# Altium PCB PCB_edp12.PcbDoc
Units mil, origin at the board's own origin, x right, y up, seen from the top; angles counter-clockwise.
Board outline 2550 x 4000 mil, 2 copper layers (Top Layer, Bottom Layer); 31 components, 23 nets, 168 pads, 59 vias.
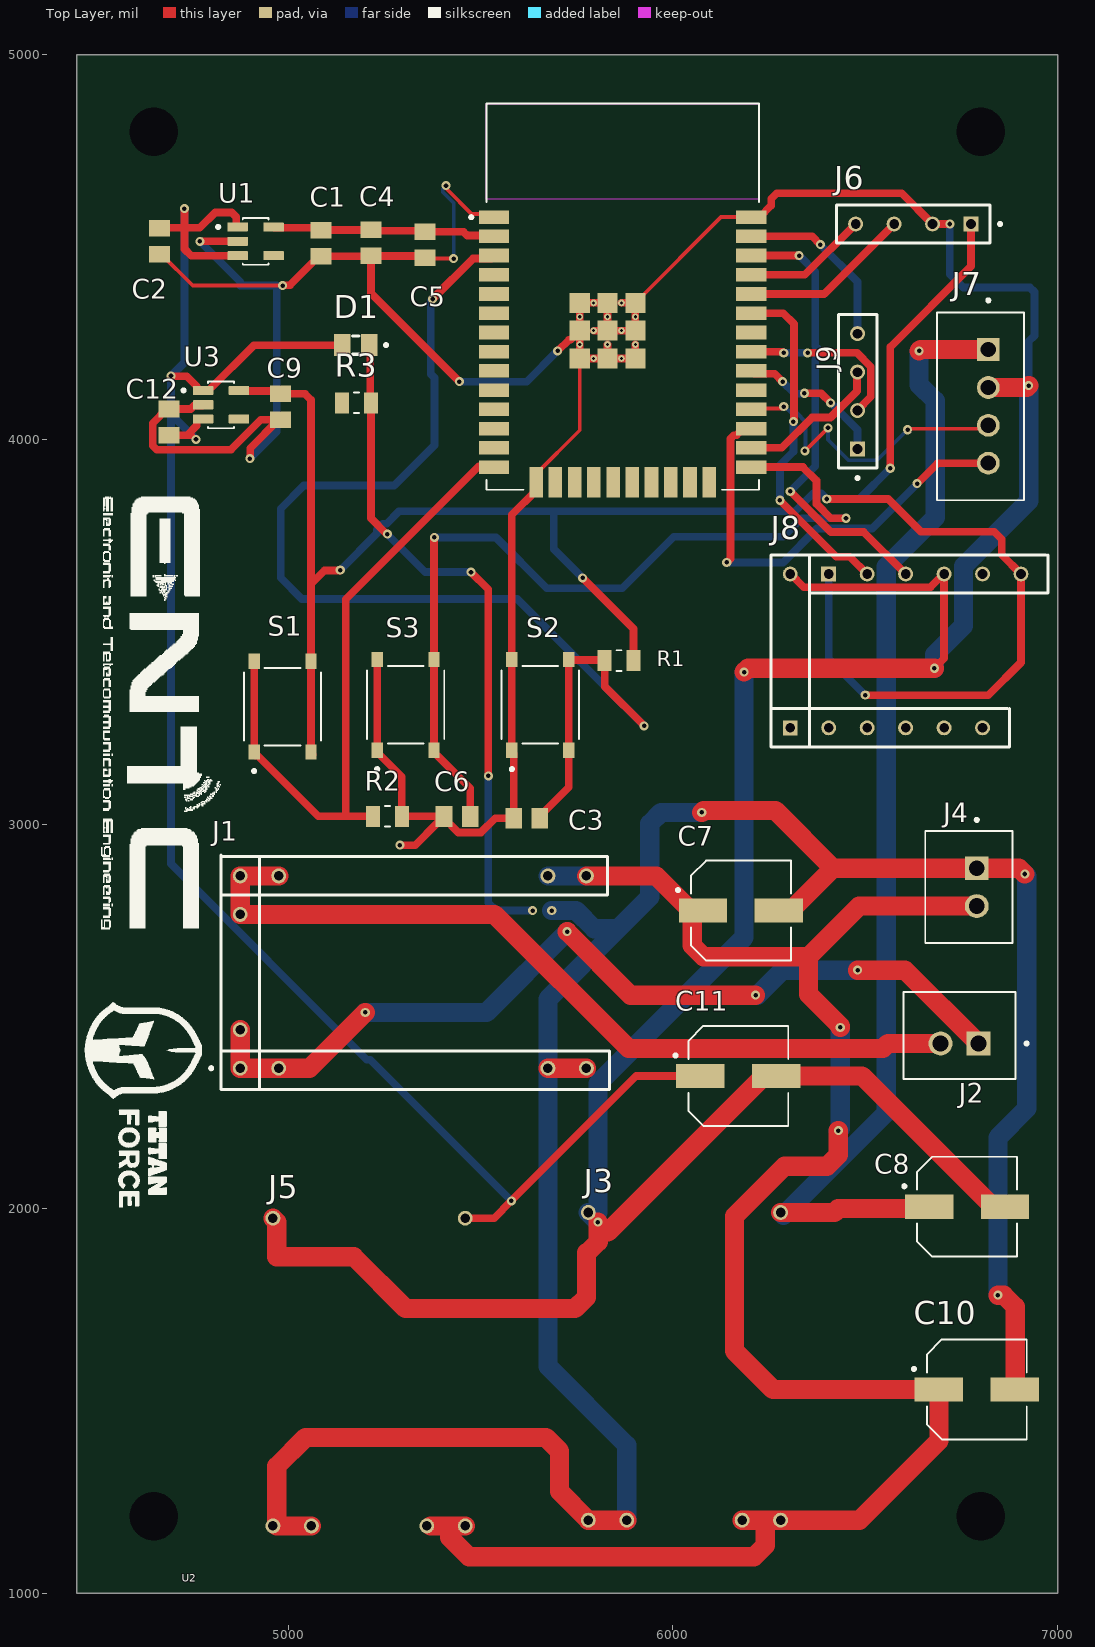
[diagram p0: Top Layer view]
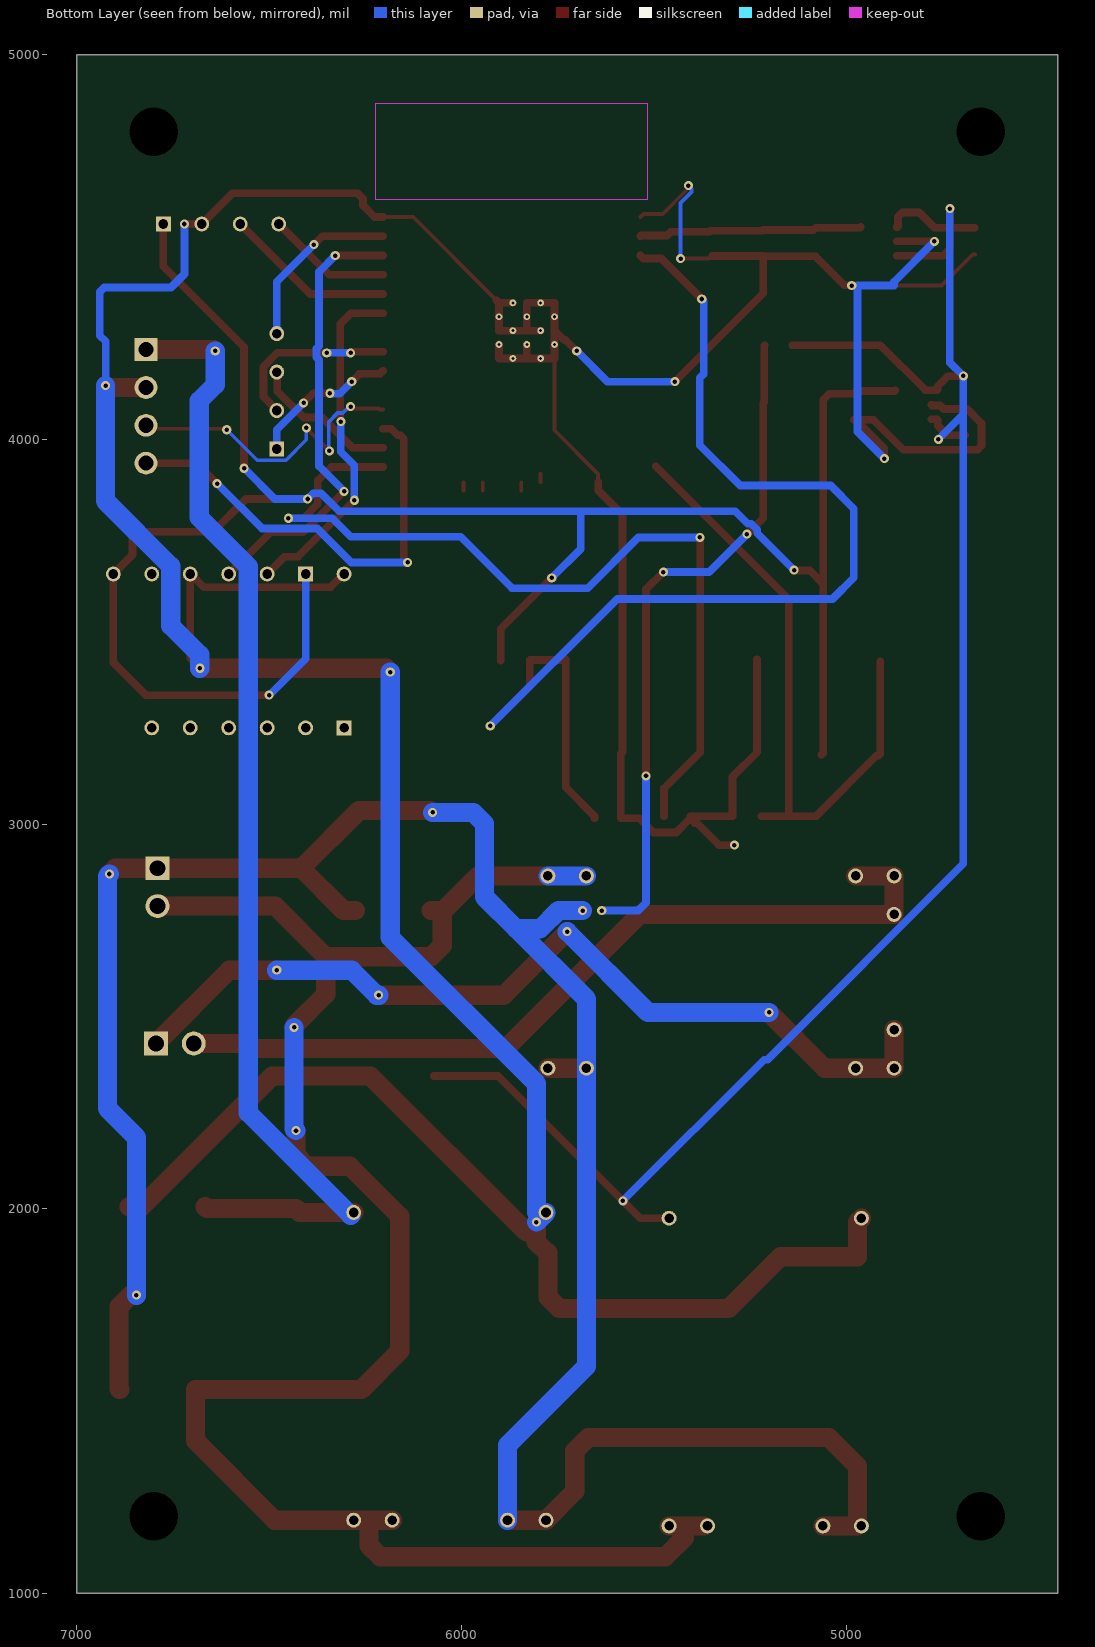
[diagram p1: Bottom Layer view, seen from below]

## Layer stack, top to bottom
Top Solder: solder mask 0.4, Solder Resist, Dk 3.5
Top Layer: signal copper 1.4
Dielectric 1: dielectric 12.6, FR-4, Dk 4.8
Bottom Layer: signal copper 1.4
Bottom Solder: solder mask 0.4, Solder Resist, Dk 3.5

## Board outline
4450,1000 7000,1000 7000,5000 4450,5000

## Design rules (kind name [scope] priority, off if disabled: settings)
Clearance [All] p1: gap=5 ignorepadtopadclearanceinfootprint=FALSE except(0: Arc-Hole Track-Hole SMDPad-Hole THPad-Hole Via-Hole Fill-Hole Poly-Hole Region-Hole Text-Hole)
ComponentClearance [All] p1: gap=5 collisioncheckmode=3 verticalgap=5 showdistances=TRUE
DiffPairsRouting [All] p1: maxlimit=5 minlimit=5 mostfreqgap=5 toplayer_minwidth=5 toplayer_maxwidth=71497.95 toplayer_prefwidth=5 bottomlayer_minwidth=5 bottomlayer_maxwidth=71497.95 bottomlayer_prefwidth=5 maxuncoupledlength=500
Height [All] p1: minheight=0 maxheight=71497.94 prefheight=500
HoleSize [All] p1: absolutevalues=TRUE maxlimit=248.03 minlimit=11.81 maxpercent=80.000 minpercent=20.000
HoleToHoleClearance [All] p1: gap=9.84 allowstackedmicrovias=FALSE
MinimumAnnularRing [All] p1: minimumring=5
MinimumSolderMaskSliver [All] p1: minsoldermaskwidth=0
PlaneClearance [All] p1: clearance=5
PlaneConnect [All] p1: planeconnectstyle=Direct reliefexpansion=4 reliefentries=4 reliefconductorwidth=4 reliefairgap=4
PolygonConnect PolygonConnectVias [All vs IsVia] p1: connectstyle=Direct reliefconductorwidth=4 reliefentries=4 polygonreliefangle="90 Angle" airgapwidth=4
PolygonConnect PolygonConnectPowerPads [All vs InPadClass('PowerPads')] p2: connectstyle=Direct reliefconductorwidth=10 reliefentries=4 polygonreliefangle="90 Angle" airgapwidth=10
PolygonConnect [All] p3: connectstyle=Relief reliefconductorwidth=5 reliefentries=4 polygonreliefangle="90 Angle" airgapwidth=5
RoutingVias [All] p1: holewidth=11.81 width=23.62 viastyle="Through Hole" minholewidth=11.81 minwidth=23.62 maxholewidth=248.03 maxwidth=257.87
SilkToSilkClearance [All] p1: silktosilkclearance=0
SilkToSolderMaskClearance [IsPad] p1: minsilkscreentomaskgap=5 clearancetoexposedcopper=TRUE
SolderMaskExpansion [All] p1: expansion=2.95 istentingtop=FALSE
UnpouredPolygon BoardOutlineClearance [All] p2:
Width [All] p1: maxlimit=71497.94 minlimit=5 preferedwidth=5 minimp=50.000000 maximp=50.000000 favimp=50.000000
20 further rules are at their usual default settings.

## Components (designator, comment, footprint, x,y, rotation, side; value= is the part's Value field where it differs from the comment)
C1 "1uF" CAPC2012X135N 5085,4510 r270 top
C2 "1uF" CAPC2012X135N 4665,4515 r270 top
C3 "CL31A106KBHNNNE" CAPC2012X135N 5620,3015 r180 top
C4 "10uF" CAPC2012X135N 5215,4511.02 r90 top
C5 "100nF" CAPC2012X135N 5355,4506.02 r90 top
C6 "CL31A106KBHNNNE" CAPC2012X135N 5438.98,3020 r180 top
C7 "47uF" CAP_EEEFH1V470XL 6176.57,2775 r0 top
C8 "47uF" CAP_EEEFH1V470XL 6765,2005 r0 top
C9 "1uF" CAPC2012X135N 4980,4085 r270 top
C10 "47uF" CAP_EEEFH1V470XL 6790,1530 r0 top
C11 "47uF" CAP_EEEFH1V470XL 6170,2345 r0 top
C12 "1uF" CAPC2012X135N 4690,4045 r90 top
D1 "597-3305-607F" LEDC2012X70N 5175.43,4245 r180 top
J1 "TP5100" SAMTEC_TS-121-G-AA#1 5875,2365 r0 top
J2 "Vin" JST_B2B-XH-A(LF)(SN) 6745,2450 r0 top
J3 "TS-121-G-AA" SAMTEC_TS-121-G-AA#2 6380,2090 r90 top
J4 "Battery" JST_B2B-XH-A(LF)(SN) 6769.33,2835.79 r90 top
J5 "TS-121-G-AA" SAMTEC_TS-121-G-AA#2 5560,2075 r90 top
J6 "Code_uploader" SAMTEC_TS-115-G-AA#1 6075,4560 r180 top
J7 "GSM JST Connector" JST_B4B-XH-A(LF)(SN) 6799.33,4085.79 r90 top
J8 "TS-115-G-AA" SAMTEC_TS-115-G-AA#2 7005,3150 r0 top
J9 "Current sensor" SAMTEC_TS-115-G-AA#1 6480,4675 r90 top
R1 "10K" RESC2012X60N 5860,3425 r0 top
R2 "10K" RESC2012X60N 5257.6,3020 r180 top
R3 "330" RESC2012X60N 5177.4,4095 r0 top
S1 "PB1" SW_TS-1187A-B-A-B 4985,3305 r90 top
S2 "RESET" SW_TS-1187A-B-A-B 5655,3310 r90 top
S3 "BOOT" SW_TS-1187A-B-A-B 5305,3310 r90 top
U1 "AP2112K-3.3TRG1" SOT95P285X140-5N 4915,4515 r0 top
U2 "ESP32-WROOM-32D" MODULE_ESP32-WROOM-32D 5869.37,4370.94 r0 top
U3 "AP2112K-3.3TRG1" SOT95P285X140-5N 4825,4090 r0 top

## Footprints (in the part's own frame and the unit in brackets; to place one, negate y for a bottom-side part, rotate by r counter-clockwise, add the part's x,y. Pads: shape width x height; smd on the part's side, far side on the other; paste and mask are expansions set on the pad)
CAP_EEEFH1V470XL [mm]
  rect 3.2x1.6 smd: 1(-2.5,0) 2(2.5,0)
  silkscreen extent -4.25,-3.3 3.3,3.3, body extent -3.65,-3.3 3.65,3.3, height 7.7
CAPC2012X135N [mm]
  rect 1.1x1.38 smd: 1(-0.863,0) 2(0.863,0)
JST_B2B-XH-A(LF)(SN) [mm]
  rect 1.575x1.575 / inner round 1.575 / far side rect 1.575x1.575 hole 1.05: 1(1.25,-0.525)
  round 1.575 hole 1.05: 2(-1.25,-0.525)
  silkscreen extent -3.7,-2.88 4.54,2.88, body extent -3.7,-2.88 3.7,2.88, height 7
JST_B4B-XH-A(LF)(SN) [mm]
  rect 1.508x1.508 / inner round 1.508 / far side rect 1.508x1.508 hole 1: 1(3.75,-0.525)
  round 1.508 hole 1: 2(1.25,-0.525) 3(-1.25,-0.525) 4(-3.75,-0.525)
  silkscreen extent -6.2,-2.88 7.1,2.88, body extent -6.2,-2.88 6.2,2.88, height 7
LEDC2012X70N [mm]
  rect 1.1x1.45 smd: A(0.9,0) C(-0.9,0)
  silkscreen extent -2.1,-0.6 0.2,0.6, body extent -1,-0.63 1,0.63, height 0.7
MODULE_ESP32-WROOM-32D [mm]
  rect 2x0.9 smd: 1(-8.5,5.26) 2(-8.5,3.99) 3(-8.5,2.72) 4(-8.5,1.45) 5(-8.5,0.18) 6(-8.5,-1.09) 7(-8.5,-2.36) 8(-8.5,-3.63) 9(-8.5,-4.9) 10(-8.5,-6.17) 11(-8.5,-7.44) 12(-8.5,-8.71) 13(-8.5,-9.98) 14(-8.5,-11.25) 25(8.5,-11.25) 26(8.5,-9.98) 27(8.5,-8.71) 28(8.5,-7.44) 29(8.5,-6.17) 30(8.5,-4.9) 31(8.5,-3.63) 32(8.5,-2.36) 33(8.5,-1.09) 34(8.5,0.18) 35(8.5,1.45) 36(8.5,2.72) 37(8.5,3.99) 38(8.5,5.26)
  rect 0.9x2 smd: 15(-5.715,-12.25) 16(-4.445,-12.25) 17(-3.175,-12.25) 18(-1.905,-12.25) 19(-0.635,-12.25) 20(0.635,-12.25) 21(1.905,-12.25) 22(3.175,-12.25) 23(4.445,-12.25) 24(5.715,-12.25)
  rect 1.33x1.33 smd: 39_1(-2.835,-0.405) 39_2(-1,-0.405) 39_3(0.835,-0.405) 39_4(-2.835,-2.24) 39_5(-1,-2.24) 39_6(0.835,-2.24) 39_7(-2.835,-4.075) 39_8(-1,-4.075) 39_9(0.835,-4.075)
  round 0.45 hole 0.2: 39_10(-1.917,-0.405) 39_11(-0.082,-0.405) 39_12(-2.835,-1.322) 39_13(-1,-1.322) 39_14(0.835,-1.322) 39_15(-1.917,-2.24) 39_16(-0.082,-2.24) 39_17(-2.835,-3.157) 39_18(-1,-3.157) 39_19(0.835,-3.157) 39_20(-1.917,-4.075) 39_21(-0.082,-4.075)
  Keep-Out Layer region: 9,6.45 -9,6.45 -9,12.75 9,12.75
  silkscreen extent -10.1,-12.75 9,12.75, body extent -9,-12.75 9,12.75, height 3.25
RESC2012X60N [mm]
  rect 0.92x1.38 smd: 1(-0.955,0) 2(0.955,0)
  silkscreen extent -0.17,-0.68 0.17,0.68, body extent -1,-0.63 1,0.63, height 0.6
SAMTEC_TS-115-G-AA#1 [mm]
  rect 0.985x0.985 hole 0.635: 01(-17.78,0)
  round 0.985 hole 0.635: 02(-15.24,0) 03(-12.7,0) 04(-10.16,0)
  silkscreen extent -19.8,-1.27 -8.89,1.27
SAMTEC_TS-115-G-AA#2 [mm]
  rect 0.985x0.985 hole 0.635: 01(-17.78,2.54) 08(-15.24,12.7)
  round 0.985 hole 0.635: 02(-15.24,2.54) 03(-12.7,2.54) 04(-10.16,2.54) 05(-7.62,2.54) 06(-5.08,2.54) 07(-17.78,12.7) 09(-12.7,12.7) 10(-10.16,12.7) 11(-7.62,12.7) 12(-5.08,12.7) 13(-2.54,12.7)
  silkscreen extent -19.05,1.27 -0.76,13.97
SAMTEC_TS-121-G-AA#1 [mm]
  round 0.985 hole 0.635: 01(-25.4,12.7) 02(-22.86,12.7) 03(-25.4,10.16) 04(-25.4,2.54) 05(-25.4,0) 06(-22.86,0) 07(-5.08,12.7) 08(-2.54,12.7) 09(-5.08,0) 10(-2.54,0)
  silkscreen extent -27.42,-1.4 -1.02,14.1
SAMTEC_TS-121-G-AA#2 [mm]
  round 0.985 hole 0.635: 01(-22.86,2.54) 02(-22.86,5.08) 03(-22.86,12.7) 04(-22.86,15.24) 05(-2.54,2.54) 06(-2.54,15.24)
SOT95P285X140-5N [mm]
  rrect15% 1.35x0.6 smd: 1(-1.185,0.95) 2(-1.185,0) 3(-1.185,-0.95) 4(1.185,-0.95) 5(1.185,0.95)
  silkscreen extent -2.57,-1.55 0.85,1.55, body extent -1.5,-1.4 1.5,1.4, height 1.4
SW_TS-1187A-B-A-B [mm]
  rect 1x0.75 smd: 1(-3,1.875) 2(3,1.875) 3(-3,-1.875) 4(3,-1.875)
  silkscreen extent -4.35,-2.55 2.55,2.55

## Part data
C1 C2 C9 C12: library part CL21B105KOFNNNE, "Cap Ceramic 1uF 16V X7R 10% Pad SMD 0805 125C T/R", Package=None, Availability=Unavailable, MP=CL21B105KOFNNNE, Price=None
C3 C6: "10ÂµF Â±10% 50V Ceramic Capacitor X5R 1206 (3216 Metric)", Package="1206 Samsung", Availability=Good, MF="Samsung Electro-Mechanics", MP=CL31A106KBHNNNE, Price=None, Purchase-URL=https://pricing.snapeda.com/search/part/CL31A106KBHNNNE/?ref=eda, SnapEDA_Link=https://www.snapeda.com/parts/CL31A106KBHNNNE/Samsung%20Electro-Mechanics/view-part/3597975/?ref=snap
C4 C5: library part CL21A106KAYNNNE, "10ÂµF Â±10% 25V Ceramic Capacitor X5R 0805 (2012 Metric)", Package="0805 Samsung", Check_prices=https://www.snapeda.com/parts/CL21A106KAYNNNE/Samsung/view-part/3598482/?ref=eda, Digi-Key_Part_Number=1276-2891-1-ND, MF=Samsung, MP=CL21A106KAYNNNE, SnapEDA_Link=https://www.snapeda.com/parts/CL21A106KAYNNNE/Samsung/view-part/3598482/?ref=snap
C7 C8 C10 C11: library part EEEFH1V470XL, "Aluminum Electrolytic Capacitors, FH-V[HF] (High temp. reflow) Series, 47uF +/- 20%, 35V, Surface mount type(6.3x7.7mm)", Package="RADIAL-2 Panasonic", Check_prices=https://www.snapeda.com/parts/EEE-FH1V470XL/Panasonic/view-part/?ref=eda, MF=Panasonic, MP=EEE-FH1V470XL, SnapEDA_Link=https://www.snapeda.com/parts/EEE-FH1V470XL/Panasonic/view-part/?ref=snap
D1: "LED Uni-Color Green 4-Pin Chip 0805 T/R", Package=None, Availability=Unavailable, MP=597-3305-607F, Price=None
J1: library part TS-121-G-AA, "Connector Header position", Package=None, Availability="In Stock", Check_prices=https://www.snapeda.com/parts/TS-121-G-AA/Samtec/view-part/?ref=eda, MF=Samtec, MP=TS-121-G-AA, Price=None, Purchase-URL=https://pricing.snapeda.com/search/part/TS-121-G-AA/?ref=eda, SnapEDA_Link=https://www.snapeda.com/parts/TS-121-G-AA/Samtec/view-part/?ref=snap
J2 J4: library part B2B-XH-A(LF)(SN), "Connector Header Through Hole 2 position 0.098 (2.50mm)", Package=None, Check_prices=https://www.snapeda.com/parts/B2B-XH-A(LF)(SN)/JST/view-part/?ref=eda, MF="JST Sales", MP=B2B-XH-A(LF)(SN), SnapEDA_Link=https://www.snapeda.com/parts/B2B-XH-A(LF)(SN)/JST/view-part/?ref=snap
J3 J5: "Connector Header position", Package=None, Availability="In Stock", Check_prices=https://www.snapeda.com/parts/TS-121-G-AA/Samtec/view-part/?ref=eda, MF=Samtec, MP=TS-121-G-AA, Price=None, Purchase-URL=https://pricing.snapeda.com/search/part/TS-121-G-AA/?ref=eda, SnapEDA_Link=https://www.snapeda.com/parts/TS-121-G-AA/Samtec/view-part/?ref=snap
J6 J9: library part TS-115-G-AA, Package=None, Availability=Unavailable, MF=Samtec, MP=TS-115-G-AA, Price=None
J7: library part B4B-XH-A(LF)(SN), "Connector Header Through Hole 4 position 0.098 (2.50mm)", Package=None, Check_prices=https://www.snapeda.com/parts/B4B-XH-A(LF)(SN)/JST+Sales+America+Inc./view-part/?ref=eda, MF="JST Sales", MP=B4B-XH-A(LF)(SN), SnapEDA_Link=https://www.snapeda.com/parts/B4B-XH-A(LF)(SN)/JST+Sales+America+Inc./view-part/?ref=snap
J8: Package=None, Availability=Unavailable, MF=Samtec, MP=TS-115-G-AA, Price=None
R1 R2 R3: library part RC0805FR-0710KL, "10 kOhms Â±1% 0.125W, 1/8W Chip Resistor 0805 (2012 Metric) Moisture Resistant Thick Film", Package="2012 Rohm Semiconductor", Availability="In Stock", Check_prices=https://www.snapeda.com/parts/RC0805FR-0710KL/Yageo/view-part/?ref=eda, MF=Yageo, MP=RC0805FR-0710KL, Price=None, Purchase-URL=https://pricing.snapeda.com/search/part/RC0805FR-0710KL/?ref=eda, SnapEDA_Link=https://www.snapeda.com/parts/RC0805FR-0710KL/Yageo/view-part/?ref=snap
S1 S2 S3: library part FSM8JH, "Tactile Switch SPST-NO Top Actuated Through Hole", Package=None, Availability="In Stock", Check_prices=https://www.snapeda.com/parts/FSM8JH/TE+Connectivity+ALCOSWITCH+Switches/view-part/?ref=eda, MF="TE Connectivity", MP=FSM8JH, Price=None, SnapEDA_Link=https://www.snapeda.com/parts/FSM8JH/TE+Connectivity+ALCOSWITCH+Switches/view-part/?ref=snap
U1 U3: "Linear Voltage Regulator IC Positive Fixed 1 Output 600mA SOT-25", Package="SOT-753 Diodes Inc.", Availability="In Stock", Check_prices=https://www.snapeda.com/parts/AP2112K-3.3TRG1/Diodes+Inc./view-part/?ref=eda, MF="Diodes Inc.", MP=AP2112K-3.3TRG1, Price=None, Purchase-URL=https://pricing.snapeda.com/search/part/AP2112K-3.3TRG1/?ref=eda, SnapEDA_Link=https://www.snapeda.com/parts/AP2112K-3.3TRG1/Diodes+Inc./view-part/?ref=snap
U2: "Bluetooth, WiFi 802.11b/g/n, Bluetooth v4.2 +EDR, Class 1, 2 and 3 Transceiver Module 2.4GHz ~ 2.5GHz Integrated", Package="Non Standard Espressif Systems", Check_prices=https://www.snapeda.com/parts/ESP32-WROOM-32D/Espressif+Systems/view-part/?ref=eda, MF="Espressif Systems", MP=ESP32-WROOM-32D, SnapEDA_Link=https://www.snapeda.com/parts/ESP32-WROOM-32D/Espressif+Systems/view-part/?ref=snap

## Free pads (board coordinates)
  round 60 hole 125.9: 1(6800,1200) 1(6800,4800) 3(4650,1200) 4(4650,4800)

## Via types
v1: diameter 23.62, hole 11.81, Top Layer to Bottom Layer, 59 vias

## Nets (pads, with @x,y where several pads share a name; then routed paths per layer and width w, separated by ;. In a path a pad name is that pad's centre, name@x,y a point inside that pad or via, vN(x,y) a via of type N, cw(c..) or ccw(c..) an arc to the next point about the centre after c; other vN are vias at no path point)
+3V3: C9.1 J6.01 J8.08 J8.13 R1.2 S1.3 S1.4 U3.5 | length 5600.8
  Top Layer w20: U3.5 4873.46,4125.59 4973.39,4125.59 C9.1 5043.28,4118.98 5058.82,4103.44 5058.82,3623.82 ; S1.3@5063.58,3180 5058.82,3184.76 S1.3 S1.4 5058.82,3623.82 ; v1(5135,3660) 5134.31,3659.31 5094.31,3659.31 5058.82,3623.82 ; v1(5765,3640) 5897.6,3507.4 R1.2 ; v1(6400,3845) 6560,3845 6645,3760 6835,3760 6855,3740 6855,3700 J8.13 6905,3420 6820,3335 v1(6500,3335) ; v1(6565,3925) 6565,4240 6775,4450 J6.01
  Bottom Layer w20: v1(5135,3660) 5230.67,3755.67 5230.67,3764.87 5246.38,3780.57 5255.57,3780.57 5287.81,3812.8 5690,3812.8 ; v1(5765,3640) 5690,3715 5690,3812.8 ; v1(6405,3650) 6405,3430 v1(6500,3335) ; v1(6565,3925) 6485,3845 v1(6400,3845) 6385,3860 6365,3860 6317.81,3812.8 5690,3812.8
+3V3.esp: C1.1 C4.2 C5.2 U1.5 U2.2 | length 584
  Top Layer w20: U1.5 4963.46,4550.59 5078.39,4550.59 C1.1 5085.51,4544.49 5214.49,4544.49 C4.2 5217.5,4542.5 5352.5,4542.5 C5.2 5455.35,4540 5465.35,4530 5532.76,4530 U2.2
+5V: C8.1 J3.05 J7.1 | length 3002.4
  Top Layer w50: J3.05 6420,1990 6430,2000 6661.57,2000 C8.1 ; v1(6640,4230) 6643.43,4233.43 J7.1
  Bottom Layer w50: J3.05@6287.5,1982.5 6554.39,2249.39 6554.39,3669.24 6681.81,3796.66 6681.81,4100.44 6640,4142.25 v1(6640,4230)
+5V.1: C2.1 C11.1 C12.1 D1.A J5.05 U1.1 U1.3 U3.1 U3.3 | length 4963.5
  Top Layer w10: C2.1 C2.1@4666.02,4550
  Top Layer w20: C2.1@4666.02,4550 4730,4550 ; C12.1 4736.77,4011.02 ; v1(4695,4165) 4695.69,4164.31 4735.69,4164.31 4761.77,4138.23 4761.77,4129.21 4763.58,4127.4 U3.1 4793.11,4127.4 4910.71,4245 D1.A ; v1(4730,4600) 4730,4550 ; 4748,4011.02 4736.77,4011.02 ; U3.3 4763.58,4052.6 4761.77,4050.79 4761.77,4036.02 4736.77,4011.02 ; U1.3 4747.4,4477.6 4730,4495 4730,4550 ; U1.1 4866.81,4552.4 4865,4554.21 4865,4578.28 4853.28,4590 4810,4590 4770,4550 4730,4550 ; J5.05 5535,1975 v1(5580,2020) 5905,2345 C11.1
  Bottom Layer w20: v1(4730,4600) 4730,4200 v1(4695,4165) 4695,4065 ; v1(4760,4000) 4695,4065 ; v1(5580,2020) 5212.83,2387.17 5204.19,2387.17 4695,2896.37 4695,4065
+Vss: C7.1 C10.1 J1.07 J1.08 J3.01 J3.02 J4.2 J5.01 J5.02 | length 4910.6
  Top Layer w50: J5.02@5370,1175 5420,1175 ; J5.01 5420,1175 ; J1.08 5956.65,2865 C7.1@6046.65,2775 ; C7.1 6056.5,2775 6050,2768.5 6050,2684.29 6079.29,2655 6352.59,2655 ; J3.02 6240,1190 ; v1(6430,2202.78) 6430,2139.29 6400.71,2110 6290,2110 6160,1980 6160,1630 6260,1530 C10.1 6691.57,1396.57 6485,1190 J3.01 6240,1190 ; v1(6435,2471.14) 6435,2475 6352.59,2557.41 6352.59,2655 ; J4.2 6484.16,2786.57 6352.59,2655 ; 5420,1175 5420,1145 5470,1095 6210.71,1095 6240,1124.29 6240,1190
  Bottom Layer w50: J1.07 J1.08 ; v1(6430,2202.78) 6435,2207.78 v1(6435,2471.14)
BOOT: C6.1 S3.3 S3.4 U2.25 | length 2300.5
  Top Layer w20: v1@5378.82,3745 S3.4 S3.3 5378.82,3186.97 5472.95,3092.83 C6.1 ; U2.25 6338.03,3928.03 6373.19,3892.87 6373.19,3832.17 6410.36,3795 v1(6450,3795)
  Bottom Layer w20: v1(5380,3745) 5540,3745 5671.81,3613.19 5868.19,3613.19 6001.81,3746.81 6287.17,3746.81 6335.36,3795 v1(6450,3795)
C2: J9.01 U2.30 | length 390.8
  Top Layer w20: U2.30 6211.73,4170.31 6264.69,4170.31 v1(6285,4150) ; v1(6341.81,4120) 6385,4120 v1(6410,4095)
  Bottom Layer w20: v1(6285,4150) 6316.72,4118.28 6333.28,4118.28 6335,4120 v1(6341.81,4120) ; v1(6410,4095) 6480,4025 J9.01
C3: J9.02 U2.31 | length 454.9
  Top Layer w20: U2.31 6285.16,4228.03 v1(6288.19,4225) ; v1(6350,4225) 6478.63,4225 6514.39,4189.24 6514.39,4110.46 6480,4076.07 J9.02
  Bottom Layer w20: v1(6288.19,4225) v1(6350,4225)
C4: J9.04 U2.37 | length 459.9
  Top Layer w20: U2.37 6361.97,4528.03 v1(6383.54,4506.46)
  Bottom Layer w20: v1(6383.54,4506.46) 6480,4410 J9.04
C.1: J9.03 U2.26 | length 385.6
  Top Layer w20: U2.26 6283.03,3978.03 6361.81,4056.81 6409.73,4056.81 6478.53,4125.61 6478.53,4173.53 J9.03
EN: C3.1 R1.1 S2.3 S2.4 U2.3 | length 3097.1
  Top Layer w20: v1(5375,4365) 5480.31,4470.31 5527.01,4470.31 U2.3 ; C3.1 5653.98,3020.51 5728.82,3095.35 S2.3 S2.4 5730.37,3426.56 5820.85,3426.56 R1.1 5822.4,3357.6 v1(5925,3255)
  Bottom Layer w20: v1(5375,4365) 5370,4360 5370,4170 5380,4160 5380,3985 5275,3880 5040,3880 4980,3820 4980,3640 5035,3585 5595,3585 v1(5925,3255)
GND: C1.2 C2.2 C3.2 C4.1 C5.1 C6.2 C8.2 C9.2 C11.2 C12.2 J3.06 J5.06 J6.02 J7.2 J8.07 J8.11 R2.1 S2.1 S2.2 S3.1 S3.2 U1.2 U2.1 U2.15 U2.38 U2.39_1 U2.39_2 U2.39_3 U2.39_4 U2.39_5 U2.39_6 U2.39_7 U2.39_8 U2.39_9 U2.39_10 U2.39_11 U2.39_12 U2.39_13 U2.39_14 U2.39_15 U2.39_16 U2.39_17 U2.39_18 U2.39_19 U2.39_20 U2.39_21 U3.2 | length 14271.3
  Top Layer w10: C2.2 4670.51,4481.02 4751.54,4400 v1(4985,4400) ; C4.1@5213.98,4476.02 C4.1 ; C5.1 5357.05,4470 v1(5430,4470) ; v1(5410,4660) 5412.61,4657.39 5412.61,4650.21 5476.46,4586.35 5526.4,4586.35 U2.1 ; U2.15 5644.37,3910.31 5757.76,4023.7 U2.39_7 ; U2.39_3@5908.62,4361.38 6125.28,4578.03 U2.38
  Top Layer w20: v1(4770,4515) U1.2 ; U3.2 4776.54,4088.19 4755.38,4088.19 4746.16,4078.98 C12.2 4684.49,4078.98 4647.83,4042.32 4647.83,3983.16 4657.8,3973.19 4850.81,3973.19 4928.64,4051.02 C9.2@4974.49,4051.02 ; v1(4900,3950) 4900.69,3950.69 4900.69,3977.23 C9.2@4974.49,4051.02 ; C9.2 C9.2@4974.49,4051.02 ; v1(4985,4400) 4985.69,4400.69 5004.16,4400.69 5079.49,4476.02 C1.2 C4.1@5213.98,4476.02 ; S3.2 S3.1 5231.18,3186.97 5295.2,3122.95 R2.1 C6.2 C6.2@5405,3014.49 ; v1(5290,2945) 5330,2945 5387.83,3002.83 5393.35,3002.83 C6.2@5405,3014.49 ; C5.1@5347.95,4477.05 C4.1 5215,4380 v1(5445,4150) ; U2.15 5644.37,3867.01 5581.18,3803.82 S2.2 S2.1 5581.18,3186.97 5586.02,3182.13 C3.2 5537.98,3015 5500.82,2977.83 5441.65,2977.83 C6.2@5405,3014.49 ; v1(5700,4230) 5700.98,4230 5729.96,4258.98 5733.98,4258.98 U2.39_4 ; U2.39_15 U2.39_5 ; U2.39_18 U2.39_8 ; U2.39_11 U2.39_3 ; U2.39_19 U2.39_9 U2.39_21 U2.39_8 ; U2.39_3@5908.62,4361.38 U2.39_3 ; U2.38 6225.67,4578.03 6255.86,4608.22 6255.86,4625.86 6270,4640 6595,4640 J6.02 v1(6720,4560) ; J8.07 6306.07,3650 6340.46,3615.61 6669.54,3615.61 6703.93,3650 J8.11 6705,3430.98 6680,3405.98 v1(6680,3405) ; U2.39_4 U2.39_12 U2.39_1 U2.39_10 U2.39_2 U2.39_13 U2.39_5 ; U2.39_4 U2.39_17 U2.39_7 U2.39_20 U2.39_8 ; U2.39_5 U2.39_16 U2.39_6 U2.39_14 U2.39_3
  Top Layer w50: J5.06 4970,1965 4970,1875 5170,1875 5305,1740 5745.71,1740 5775,1769.29 5775,1885 5776.93,1885 5805.96,1914.04 ; 5805,1915 v1(5805,1965) ; 5830.96,1939.04 6236.93,2345 C11.2 6491.93,2345 6831.93,2005 C8.2 ; v1(6185,3395) 6195,3405 v1(6680,3405) ; J7.2 6920,4135 v1(6925,4140)
  Bottom Layer w10: v1(5410,4660) 5401.64,4651.64 5401.64,4643.36 5430,4615 v1(5430,4470)
  Bottom Layer w20: v1(4770,4515) 4875,4410 4875,4400 4970,4400 4970,4020 v1(4900,3950) ; v1(5445,4150) 5620,4150 v1(5700,4230) ; v1(6720,4560) 6720,4430 6755,4395 6928.28,4395 6940,4383.28 6940,4269.63 6925,4254.63 v1(6925,4140)
  Bottom Layer w50: J3.06 v1(5805,1965) ; 5805,1990 5805,2325.15 6185,2705.15 v1(6185,3395) ; v1(6680,3405) 6680,3440 6755.61,3515.61 6755.61,3670.46 6925,3839.85 v1(6925,4140)
GND.1: C7.2 C10.2 J1.09 J1.10 J3.03 J3.04 J4.1 J5.03 J5.04 | length 6280
  Top Layer w50: J5.03 4970,1175 4970,1330 5045,1405 5670,1405 5705,1370 5705,1265 J3.04 J3.03 ; J1.09 J1.10 ; v1(6075,3030) 6080,3035 6266.5,3035 6416.5,2885 ; C7.2 6306.5,2775 6416.5,2885 ; v1(6845,1775) 6860,1775 6890,1745 6890,1531.57 C10.2 ; v1(6915,2870) 6900,2885 v1(6790,2885) 6416.5,2885
  Bottom Layer w50: v1(5685,2775) 5747.78,2775 5795.28,2727.5 5857.5,2727.5 ; J3.03 5880,1385 5675,1590 J1.09 5675,2545 5857.5,2727.5 ; v1(6075,3030) 5969.29,3030 5940,3000.71 5940,2810 5857.5,2727.5 ; v1(6845,1775) 6845,2185 6920,2260 6920,2865 v1(6915,2870)
NetD1_C: D1.C R3.2 | length 1771.6
  Top Layer w20: D1.C 5212.93,4242.93 5212.93,4097.07 R3.2 5215,3795 5256.24,3753.76 v1(5257.48,3753.76) ; v1(5475,3655) 5520,3610 v1(5520,3125)
  Bottom Layer w20: v1(5257.48,3753.76) 5356.24,3655 v1(5475,3655) ; v1(5520,3125) 5520,2795 5540,2775 v1(5635,2775)
NetJ1_01: J1.01 J1.02 J1.03 J2.2 | length 2170.8
  Top Layer w50: J1.02 J1.01 J1.03 5535.96,2765 5884.82,2416.14 6545.78,2416.14 6558.97,2429.33 J2.2
NetJ1_04: J1.04 J1.05 J1.06 J2.1 | length 2340.5
  Top Layer w50: J1.04 J1.05 J1.06 5055,2365 v1(5200,2510) ; v1(5725,2720) 5890,2555 v1(6215,2555) ; v1(6480,2620) 6603.54,2620 J2.1
  Bottom Layer w50: v1(5200,2510) 5515,2510 v1(5725,2720) ; v1(6215,2555) 6220,2555 6285,2620 v1(6480,2620)
PB1: R2.2 S1.1 S1.2 U2.14 | length 1670.4
  Top Layer w20: S1.2 S1.1 4911.18,3181.97 4915.94,3177.2 4920.87,3177.2 5078.07,3020 5149.04,3020 ; R2.2 5149.04,3020 ; 5495,3930 5149.04,3584.04 5149.04,3020
RX_CODE: J6.03 U2.34 | length 446.4
  Top Layer w20: U2.34 6393.03,4378.03 J6.03
RX_GSM: J7.3 U2.28 | length 836.1
  Top Layer w10: U2.28 6213.03,4078.03 6215,4080 6283.19,4080 v1(6288.19,4085) ; v1(6343.19,3970) v1(6403.19,4030) ; v1(6610,4025) 6612.61,4027.61 6811.03,4027.61 J7.3
  Bottom Layer w10: v1(6288.19,4085) 6291.88,4085 6308.62,4068.25 6322.24,4068.25 6345,4045.49 6345,3971.81 v1(6343.19,3970) ; v1(6403.19,4030) 6403.19,3998.89 6456.47,3945.61 6530.61,3945.61 v1(6610,4025) v1@6615,4020
SDA: J8.09 U2.33 | length 903.3
  Top Layer w20: U2.33 6286.97,4328.03 6315,4300 6315,4047.92 v1(6313.36,4046.28) ; v1(6278.19,3841.81) 6425,3695 6460,3695 J8.09
  Bottom Layer w20: v1(6278.19,3841.81) 6278.19,3932.56 6313.36,3967.74 v1(6313.36,4046.28) v1@6312.67,4045.59
SDL: J8.10 U2.36 | length 1176.1
  Top Layer w20: U2.36 v1(6328.03,4478.03) ; v1(6305,3865) 6411.05,3758.95 6496.05,3758.95 J8.10
  Bottom Layer w20: v1(6305,3865) 6370,3930 6370,4207.08 6376.81,4213.89 6376.81,4236.11 6370,4242.92 6370,4436.06 v1(6328.03,4478.03)
TX_CODE: J6.04 U2.35 | length 325.6
  Top Layer w20: U2.35 6343.03,4428.03 J6.04
TX_GSM: J7.4 U2.27 | length 1178.1
  Top Layer w20: v1(6140,3680) 6149.65,3689.65 6149.65,4001.96 6158.43,4010.75 6165.08,4010.75 6182.36,4028.03 U2.27 ; v1(6635,3885) 6688.15,3938.15 J7.4
  Bottom Layer w20: v1(6140,3680) 6286.37,3680 6374.55,3768.19 6518.19,3768.19 v1(6635,3885)
pads on no net: J8.01 J8.02 J8.03 J8.04 J8.05 J8.06 J8.12 R3.1 U1.4 U2.4 U2.5 U2.6 U2.7 U2.8 U2.9 U2.10 U2.11 U2.12 U2.13 U2.16 U2.17 U2.18 U2.19 U2.20 U2.21 U2.22 U2.23 U2.24 U2.29 U2.32 U3.4
copper on no net: | length 86.6
  Top Layer w10: 5794.37,3888.66 5794.37,3910.31 ; 5844.37,3867.01 5844.37,3888.66 ; 5944.37,3867.01 5944.37,3888.66 ; 5994.37,3867.01 5994.37,3888.66

## Silkscreen, mask and mechanical layers (free items; w line width, h text height)
Top Overlay:
  drawing of 111 lines, arcs and shapes, not listed

## Text inside footprints (layer, text, board x,y; h text height)
U2: Mechanical 13 "ANTENNA" at 5633.15,4725.28 h70